# EAGLE board Sumoboard (EAGLE 9.4.2)
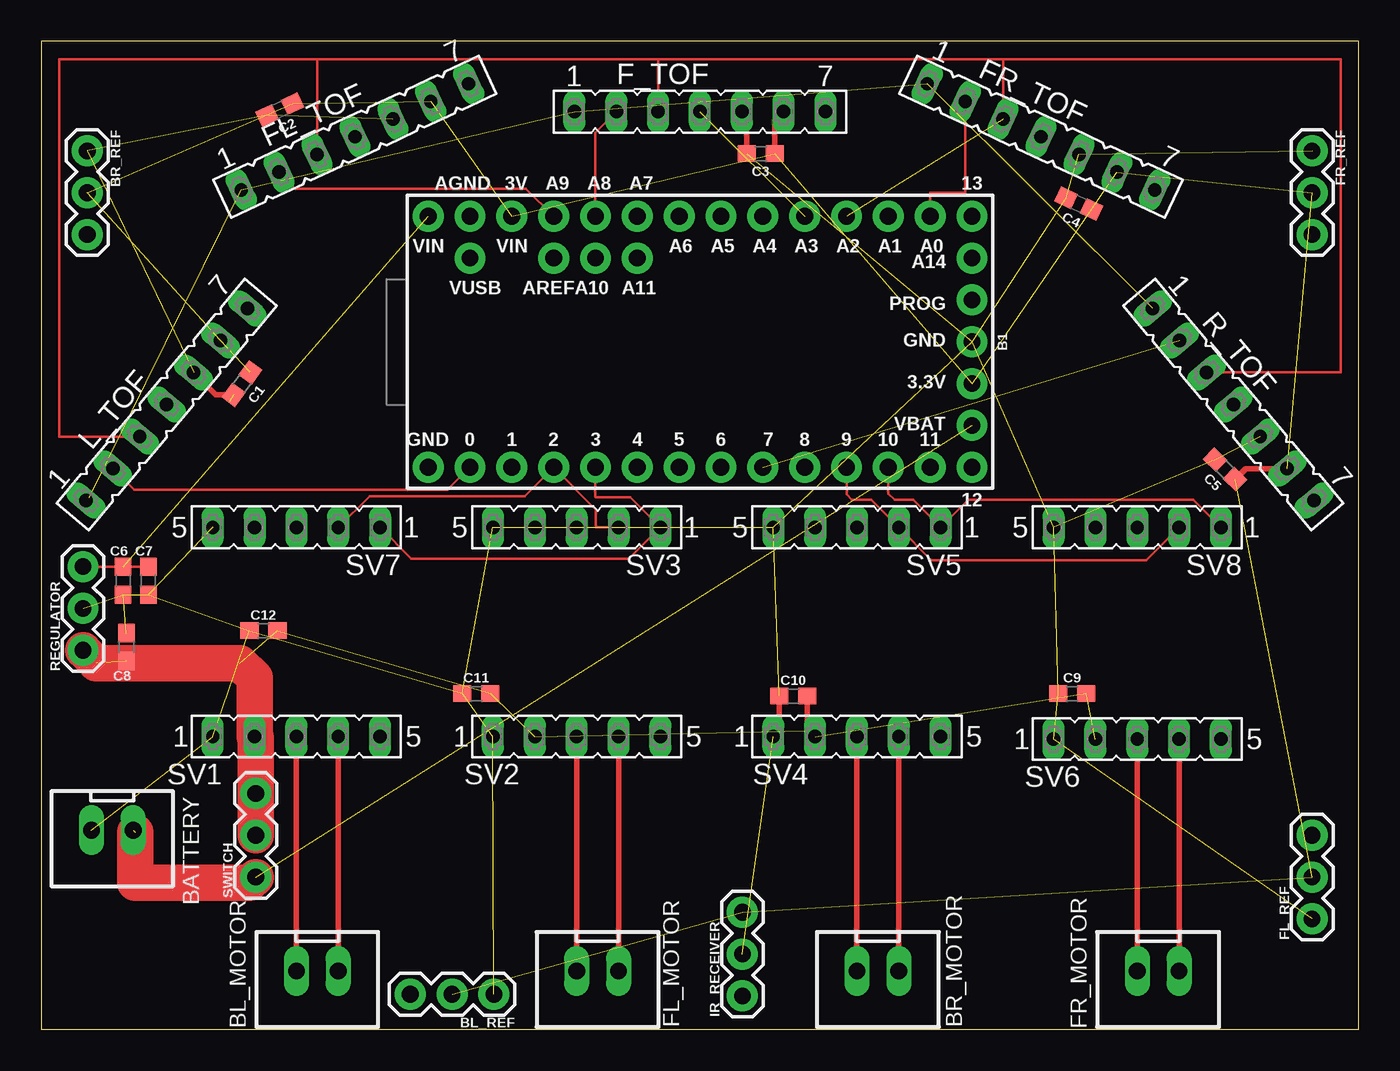
[diagram p0: board, top side]
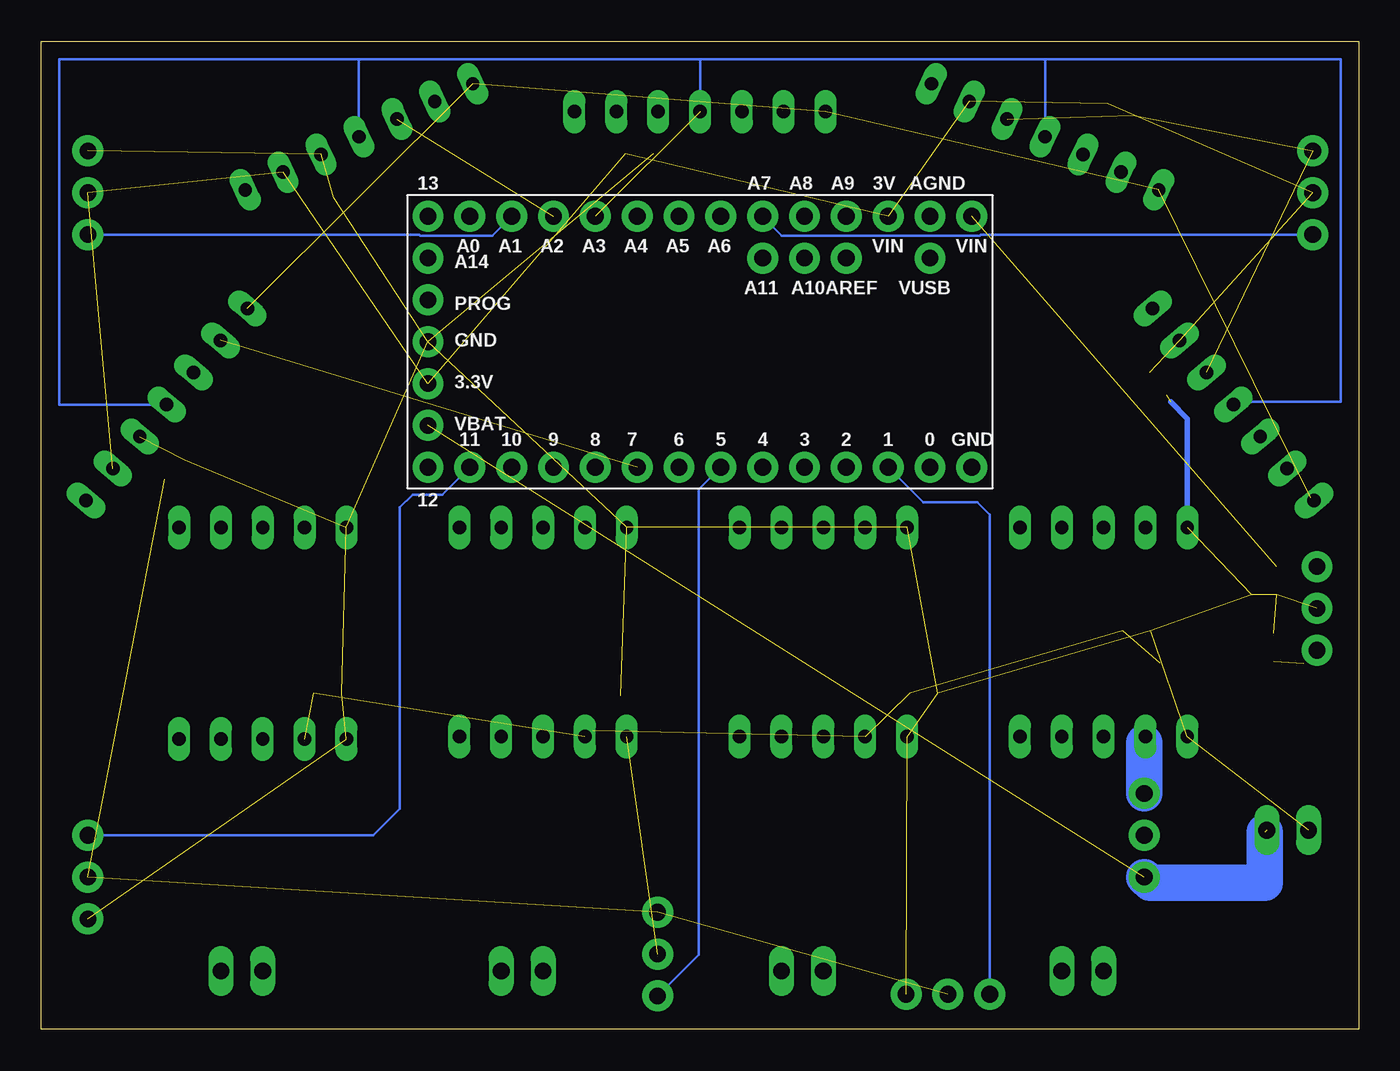
[diagram p1: board, bottom side, seen from below]

Size 80 x 60 mm. Coordinates in mm from the lower left corner, seen from the top.
Outline: 0,0 80,0 80,60 0,60 0,0
Copper layers (1*16): Top 0.035mm / dielectric 1.5mm / Bottom 0.035mm
Design rules "default *": minimum track width 6mil, minimum drill 0.3mm, track to track 6mil, track to pad 6mil, pad to pad 6mil, via to via 6mil, smd to smd 6mil, copper to edge 40mil, drill to drill 6mil, minimum pad ring 10mil, minimum via ring 8mil, stop-mask expansion 4mil, vias tented up to drill 0mil, thermal gap 10mil

## Footprints (pad centres in the part's own frame; a part is rotated, then mirrored left to right if it is on the bottom)
TEENSY-3.1 = drill 1.016 pad 1.88: 0 7.62,-13.97; 1 7.62,-11.43; 2 7.62,-8.89; 3 7.62,-6.35; 3.3V 2.54,16.51; 3V -7.62,-11.43; 4 7.62,-3.81; 5 7.62,-1.27; 6 7.62,1.27; 7 7.62,3.81; 8 7.62,6.35; 9 7.62,8.89; 10 7.62,11.43; 11 7.62,13.97; 12 7.62,16.51; 13 -7.62,16.51; 14 -7.62,13.97; 15 -7.62,11.43; 16 -7.62,8.89; 17 -7.62,6.35; 18 -7.62,3.81; 19 -7.62,1.27; 20 -7.62,-1.27; 21 -7.62,-3.81; 22 -7.62,-6.35; 23 -7.62,-8.89; A10 -5.08,-6.35; A11 -5.08,-3.81; A14/DAC -5.08,16.51; AGND -7.62,-13.97; AREF -5.08,-8.89; GND 0,16.51; GND1 7.62,-16.51; PROG -2.54,16.51; VBAT 5.08,16.51; VIN -7.62,-16.51; VUSB -5.08,-13.97
JST-XH-02-PACKAGE-LONG-PAD = drill 1.016 long: 1 -1.27,0; 2 1.27,0
1X03 = drill 1.016 pad 1.88: 1 0,0; 2 2.54,0; 3 5.08,0
0603 = smd 1.1 x 1: 1 -0.85,0; 2 0.85,0
FE07 = drill 0.813 long: 1 -7.62,0; 2 -5.08,0; 3 -2.54,0; 4 0,0; 5 2.54,0; 6 5.08,0; 7 7.62,0
FE05-1 = drill 0.813 long: 1 -5.08,0; 2 -2.54,0; 3 0,0; 4 2.54,0; 5 5.08,0

## Placement (x,y rotation side)
B1  TEENSY-3.1SILK  [TEENSY-3.1]  40.01,41.75 270 top
BATTERY  JST-XH-02-PIN-LONG-PAD  [JST-XH-02-PACKAGE-LONG-PAD]  4.32,12.1 180 top
BL_MOTOR  JST-XH-02-PIN-LONG-PAD  [JST-XH-02-PACKAGE-LONG-PAD]  16.76,3.55 180 top
BL_REF  [1X03]  27.49,2.13 180 top
BR_MOTOR  JST-XH-02-PIN-LONG-PAD  [JST-XH-02-PACKAGE-LONG-PAD]  50.8,3.55 180 top
BR_REF  [1X03]  2.79,53.34 270 top
C1  0.1uF  [0603]  12.19,39.21 233.5 top
C2  0.1uF  [0603]  14.48,55.85 205 top
C3  0.1uF  [0603]  43.69,53.18 180 top
C4  0.1uF  [0603]  62.99,50.13 155 top
C5  0.1uF  [0603]  71.88,34 135.5 top
C6  10nF  [0603]  4.98,27.24 270 top
C7  10uF  [0603]  6.5,27.24 270 top
C8  1.0uF  [0603]  5.17,23.22 270 top
C9  0.1uF  [0603]  62.59,20.4 180 top
C10  0.1uF  [0603]  45.67,20.25 180 top
C11  0.1uF  [0603]  26.42,20.4 180 top
C12  0.1uF  [0603]  13.49,24.21 180 top
F_TOF  [FE07]  40,55.72 0 top
FL_MOTOR  JST-XH-02-PIN-LONG-PAD  [JST-XH-02-PACKAGE-LONG-PAD]  33.78,3.55 180 top
FL_REF  [1X03]  77.17,6.71 90 top
FL_TOF  [FE07]  19.05,54.2 25 top
FR_MOTOR  JST-XH-02-PIN-LONG-PAD  [JST-XH-02-PACKAGE-LONG-PAD]  67.82,3.55 180 top
FR_REF  [1X03]  77.17,53.34 270 top
FR_TOF  [FE07]  60.71,54.2 335 top
IR_RECEIVER  [1X03]  42.58,2.03 90 top
L_TOF  [FE07]  7.62,37.94 50 top
R_TOF  [FE07]  72.38,37.94 310 top
REGULATOR  [1X03]  2.54,23.02 90 top
SV1  [FE05-1]  15.49,17.78 0 top
SV2  [FE05-1]  32.51,17.78 0 top
SV3  [FE05-1]  32.51,30.48 180 top
SV4  [FE05-1]  49.53,17.78 0 top
SV5  [FE05-1]  49.53,30.48 180 top
SV6  [FE05-1]  66.55,17.63 0 top
SV7  [FE05-1]  15.49,30.48 180 top
SV8  [FE05-1]  66.55,30.48 180 top
SWITCH  [1X03]  13.02,9.25 90 top

## Library data of the parts
B1 = SparkFun-Boards; SF_ID: DEV-12646
BATTERY BL_MOTOR BR_MOTOR FL_MOTOR FR_MOTOR = Rembrandt Electronics - JST XH Connectors v1-0
BL_REF BR_REF FL_REF FR_REF IR_RECEIVER REGULATOR SWITCH = SparkFun-Connectors
C1-C5 C9-C12 = SparkFun-Capacitors; PROD_ID: CAP-08604
C6 = SparkFun-Capacitors; PROD_ID: CAP-00867
C7 = SparkFun-Capacitors; PROD_ID: CAP-11015
C8 = SparkFun-Capacitors; PROD_ID: CAP-00868
F_TOF FL_TOF FR_TOF L_TOF R_TOF SV1-SV8 = con-lsta; OC_FARNELL: unknown; OC_NEWARK: unknown

## Nets
3.3V: B1.3.3V B1.3V BL_REF.2 BR_REF.2 C1.1 C2.1 C3.1 C4.1 C5.1 F_TOF.6 FL_REF.2 FL_TOF.6 FR_REF.2 FR_TOF.6 IR_RECEIVER.3 L_TOF.6 R_TOF.6
AGND: B1.AGND
BL_REF: B1.1 BL_REF.3
BR_REF: B1.21 BR_REF.3
FL_REF: B1.11 FL_REF.3
FR_REF: B1.15 FR_REF.3
GND: B1.GND BATTERY.2 BL_REF.1 BR_REF.1 C1.2 C2.2 C3.2 C4.2 C5.2 C6.2 C7.2 C8.1 C9.2 C10.2 C11.2 C12.2 F_TOF.5 FL_REF.1 FL_TOF.5 FR_REF.1 FR_TOF.5 IR_RECEIVER.2 L_TOF.5 R_TOF.5 REGULATOR.2 SV1.1 SV2.1 SV3.5 SV4.1 SV5.5 SV6.1 SV7.5 SV8.5
GND1: B1.GND1
GPIO: F_TOF.1 FL_TOF.1 FR_TOF.1 L_TOF.1 R_TOF.1
LEFT_DIR: B1.2 SV3.2 SV7.2
LEFT_PWM: B1.3 SV3.1 SV7.1
N$1: BL_MOTOR.2 SV1.3
N$2: BL_MOTOR.1 SV1.4
N$3: BR_MOTOR.1 SV4.4
N$4: BR_MOTOR.2 SV4.3
N$5: FL_MOTOR.1 SV2.4
N$6: FL_MOTOR.2 SV2.3
N$7: FR_MOTOR.1 SV6.4
N$8: FR_MOTOR.2 SV6.3
RIGHT: B1.13
RIGHT_DIR: B1.9 SV5.2 SV8.2
RIGHT_PWM: B1.10 SV5.1 SV8.1
SCL: B1.16 F_TOF.3 FL_TOF.3 FR_TOF.3 L_TOF.3 R_TOF.3
SDA: B1.17 F_TOF.4 FL_TOF.4 FR_TOF.4 L_TOF.4 R_TOF.4
VBAT: B1.VBAT BATTERY.1 SWITCH.1
VIN: C8.2 C9.1 C10.1 C11.1 C12.1 REGULATOR.1 SV1.2 SV2.2 SV4.2 SV6.2 SWITCH.2 SWITCH.3
VOUT_IR: B1.5 IR_RECEIVER.1
VREG: B1.VIN C6.1 C7.1 REGULATOR.3
VUSB: B1.VUSB
XSHUT_F: B1.22 F_TOF.2
XSHUT_FL: B1.23 FL_TOF.2
XSHUT_FR: B1.14 FR_TOF.2
XSHUT_L: B1.0 L_TOF.2
XSHUT_R: B1.7 R_TOF.2

## Tracks (layer width: path | path; a pad name or v marks a point on that pad's centre or on a via)
3.3V  (14 unrouted)
  Top 0.33: F_TOF.6 44.54,55.18 C3.1 | R_TOF.6 73.13,34.05 C5.1
BL_REF
  Bottom 0.152: B1.1 26.45,32 23.16,32 22.41,31.25 BL_REF.3
BR_REF
  Bottom 0.152: BR_REF.3 22.95,48.26 23.01,48.2 35.03,48.2 B1.21
FL_REF
  Bottom 0.152: FL_REF.3 59.84,11.79 58.22,13.41 58.22,31.7 57.45,32.46 55.64,32.46 B1.11
FR_REF
  Bottom 0.152: FR_REF.3 57.06,48.26 57,48.2 52.6,48.2 B1.15
GND  (29 unrouted)
  Top 0.33: F_TOF.5 42.84,55.42 C3.2 | SV4.1 44.82,18.15 C10.2 | C1.2 10.61,38.53 L_TOF.5
  Bottom 0.33: SV7.5 10.41,37.08 11.43,38.1
GPIO  (4 unrouted)
  Top 0.33: L_TOF.1 2.91,32.29
LEFT_DIR
  Top 0.152: SV7.2 19.94,32.38 29.37,32.38 B1.2 | B1.2 30.48,33.49 | B1.2 33.68,31.57 33.68,30.48 SV3.2
LEFT_PWM
  Top 0.152: SV7.1 22.48,28.57 35.69,28.57 SV3.1 35.76,32.31 33.68,32.31 33.66,32.33 B1.3
N$1
  Top 0.33: SV1.3 BL_MOTOR.2 15.49,3.45
N$2
  Top 0.33: SV1.4 BL_MOTOR.1 18.03,3.45
N$3
  Top 0.33: SV4.4 BR_MOTOR.1
N$4
  Top 0.33: SV4.3 BR_MOTOR.2
N$5
  Top 0.33: FL_MOTOR.1 SV2.4
N$6
  Top 0.33: SV2.3 FL_MOTOR.2
N$7
  Top 0.33: SV6.4 FR_MOTOR.1
N$8
  Top 0.33: SV6.3 FR_MOTOR.2
RIGHT_DIR
  Top 0.152: B1.9 48.9,32.49 49.23,32.16 50.39,32.16 SV5.2 54.05,28.5 67.11,28.5 SV8.2
RIGHT_PWM
  Top 0.152: B1.10 51.44,32.54 51.82,32.16 52.93,32.16 SV5.1 56.29,32.16 69.95,32.16 SV8.1
SCL  (1 unrouted)
  Top 0.152: L_TOF.3 1.09,35.99 1.09,58.91 16.75,58.91 | R_TOF.3 78.91,39.89 78.91,58.91 58.42,58.91 58.4,58.91 | 16.75,58.91 37.46,58.91 | 37.46,58.91 58.4,58.91 | F_TOF.3 37.46,58.91 | FL_TOF.3 16.75,58.91 | FR_TOF.3 58.4,58.91
  Top 0.33: L_TOF.3 6.42,35.56
SDA  (1 unrouted)
  Bottom 0.152: L_TOF.4 7.62,38.1 1.09,38.1 1.09,58.91 19.05,58.91 | R_TOF.4 78.91,37.94 78.91,58.91 60.71,58.91 | 19.05,58.91 40.01,58.91 | 40.01,58.91 60.71,58.91 | FL_TOF.4 19.05,58.91 | FR_TOF.4 60.71,58.91 | F_TOF.4 40,58.9 40.01,58.91
VBAT  (2 unrouted)
  Top 2.223: 5.71,11.97 5.71,8.89 12.67,8.89 SWITCH.1
  Bottom 2.223: 5.71,11.97 5.71,8.89 12.67,8.89 SWITCH.1
VIN  (7 unrouted)
  Top 0.33: C10.1 46.52,18.14 SV4.2
  Top 2.223: SWITCH.2 SWITCH.3 13.02,17.71 SV1.2 12.95,21.34 12.06,22.23 3.33,22.23 REGULATOR.1
  Bottom 2.223: SWITCH.3 13.02,17.41
VOUT_IR
  Bottom 0.152: IR_RECEIVER.1 40.08,4.53 40.08,32.78 B1.5
VREG  (1 unrouted)
  Top 0.152: REGULATOR.3 4.96,28.1 C6.1 C7.1
XSHUT_F
  Top 0.152: B1.22 33.66,54.45 F_TOF.2
XSHUT_FL
  Top 0.152: B1.23 29.43,51.05 15.54,51.05 15.44,51.05 FL_TOF.2
XSHUT_FR
  Top 0.152: FR_TOF.2 56.1,50.8 53.98,50.8 B1.14
XSHUT_L
  Top 0.152: L_TOF.2 5.64,32.77 24.69,32.77 24.69,32.78 B1.0
XSHUT_R  (1 unrouted)